# Altium PCB PCB1Good.PcbDoc
Units mm, origin at the board's own origin, x right, y up, seen from the top; angles counter-clockwise.
Board outline 152.4 x 101.6 mm, 2 copper layers (Top Layer, Bottom Layer); 69 components, 63 nets, 279 pads, 50 vias.
Unrouted connection lines stored in the file: 3.
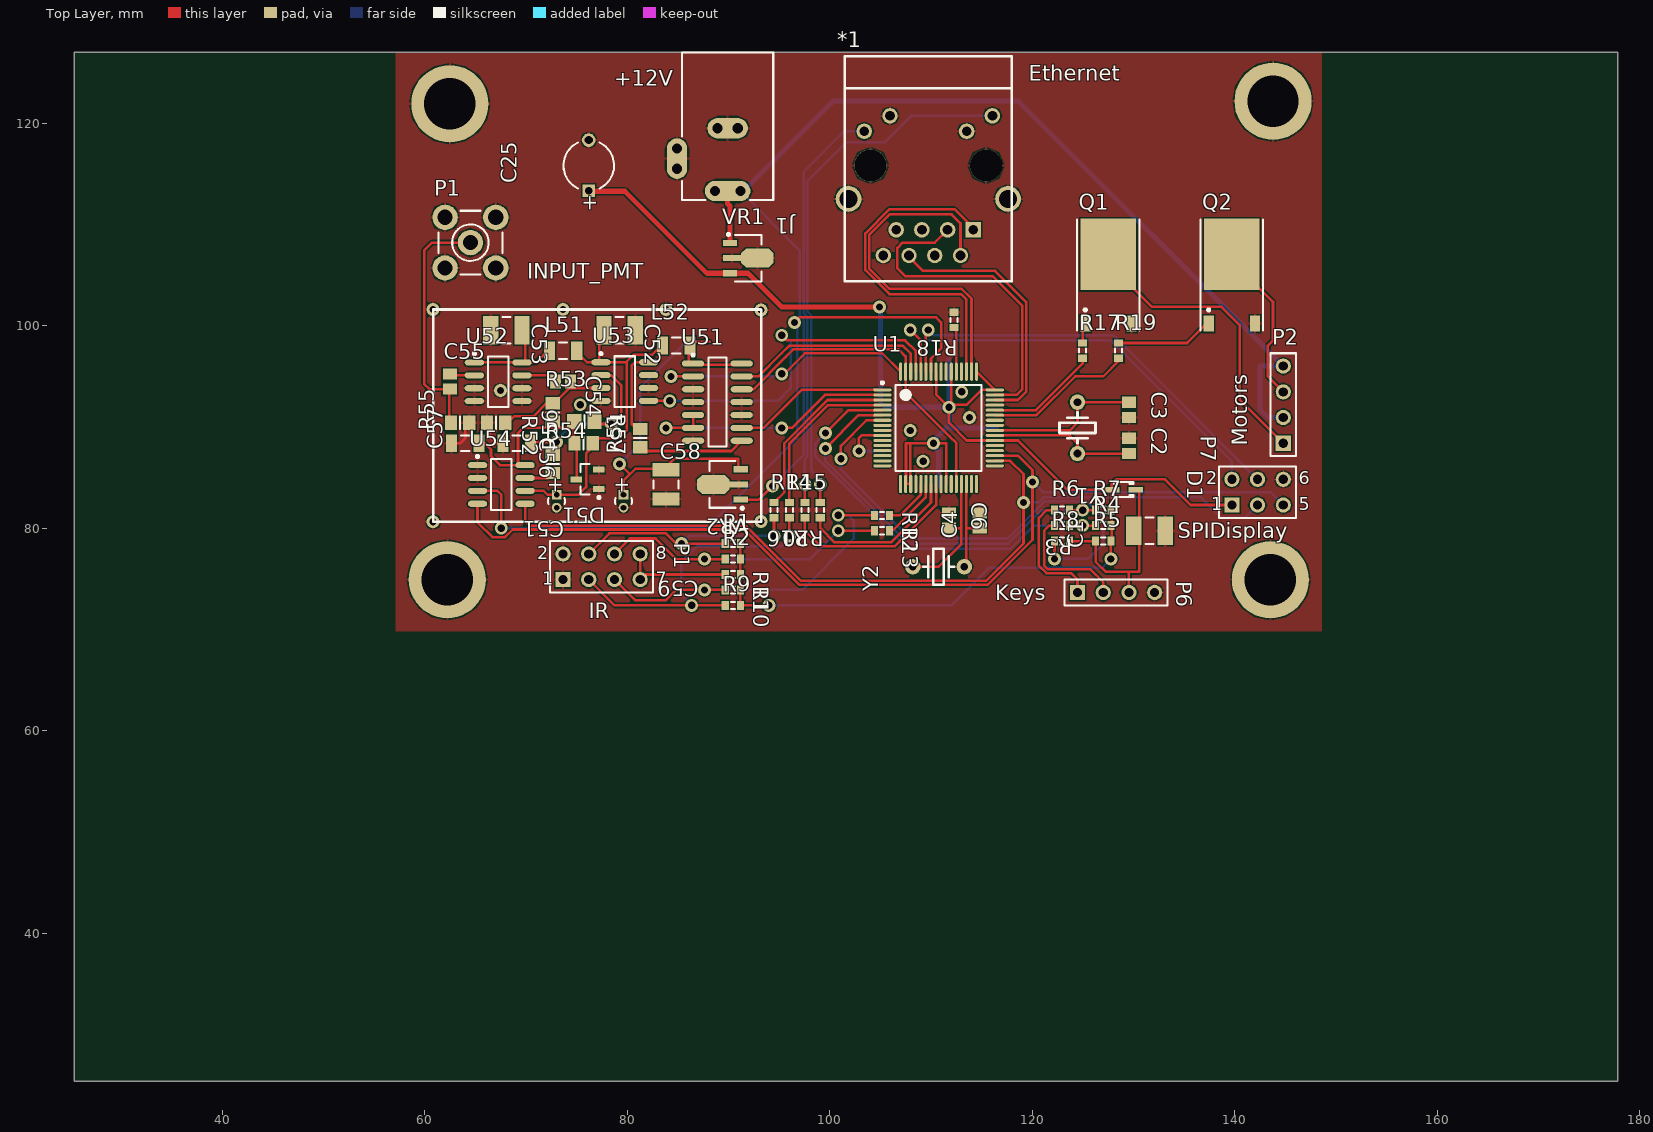
[diagram p0: Top Layer view]
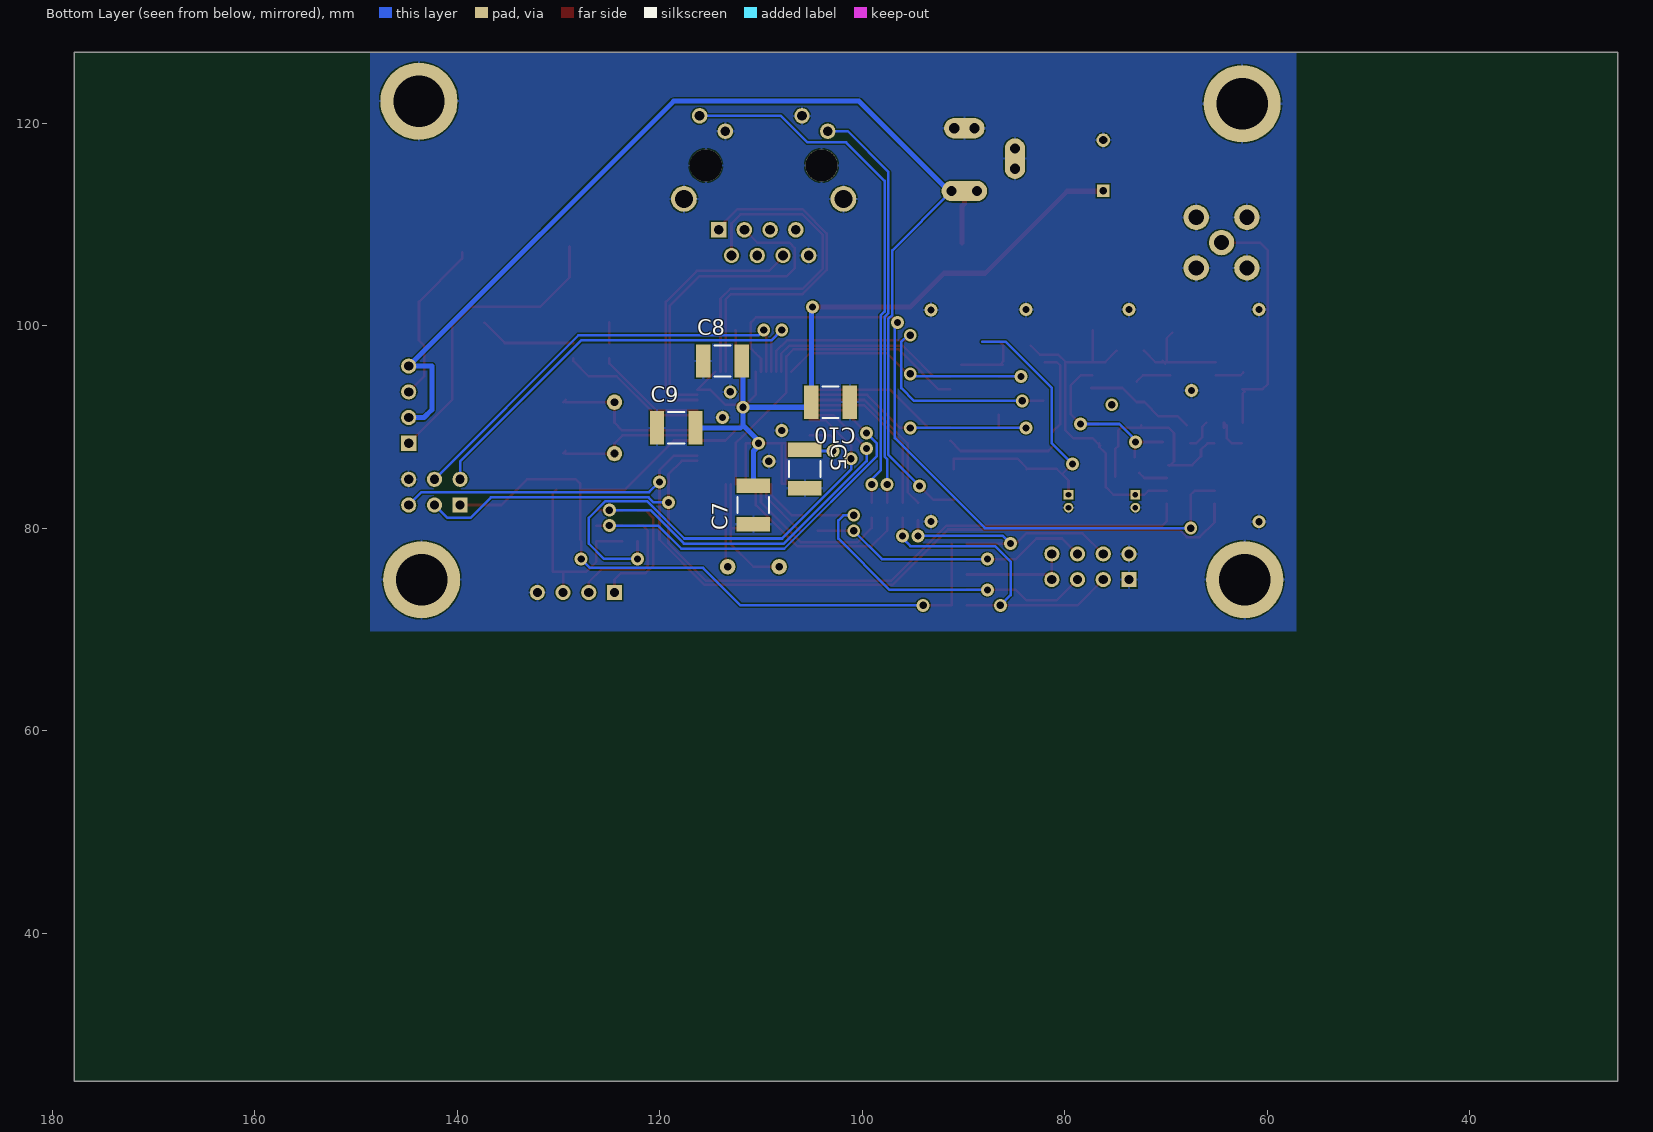
[diagram p1: Bottom Layer view, seen from below]

## Layer stack, top to bottom
Top Layer: signal copper 0.0356
Dielectric: dielectric 0.32, FR-4, Dk 4.8
Bottom Layer: signal copper 0.0356

## Board outline
25.4,25.4 177.8,25.4 177.8,127 25.4,127

## Design rules (kind name [scope] priority, off if disabled: settings)
Clearance [All] p1: gap=0.127
PolygonConnect [All] p1: connectstyle=Relief reliefconductorwidth=0.254 reliefentries=4 polygonreliefangle="90 Angle"
RoomDefinition Sheet1 [InComponentClass('Sheet1')] p1: confinementstyle=ConfineOut formatcopy=TRUE lockcomponents=FALSE outline 178.816,27.178 193.548,27.178 193.548,41.656 178.816,41.656
RoomDefinition Amp [InComponentClass('Amp')] p2: confinementstyle=ConfineOut formatcopy=TRUE lockcomponents=FALSE outline 186.436,5.588 258.064,5.588 258.064,26.162 186.436,26.162
RoutingVias [All] p1: holewidth=0.711 width=1.27 viastyle="Through Hole" minholewidth=0.711 minwidth=1.27 maxholewidth=0.711 maxwidth=1.27
SilkscreenOverComponentPads [All] p1: minsilkscreentomaskgap=0.254
SolderMaskExpansion [All] p1: expansion=0.102
Width [All] p1: maxlimit=2.54 minlimit=0.254 preferedwidth=0.254
27 further rules are at their usual default settings.

## Classes and differential pairs
component class Amp: C51 C52 C53 C54 C55 C56 C57 C58 C59 D51 L51 L52 P1 P? R51 R52 R53 R54 R55 R56 R57 U51 U52 U53 U54 VR2
component class Sheet1: * *1 *2 *3 *4 *5 *6 *7 *8 C1 C2 C3 C4 C5 C6 C7 C8 C9 C10 C11 C12 D1 J1 J2 P1 P2 P6 P7 Q1 Q2 R1 R2 R3 R4 R5 R6 R7 R8 R9 R10 R11 R12 R13 R14 R15 R16 R17 R18 R19 R20 R21 R22 R23 R24 R25 U1 U2 U3 U4 VR1 Y1 Y2

## Components (designator, comment, footprint, x,y, rotation, side; value= is the part's Value field where it differs from the comment)
*1 "Component_1" EthernetCON 109.728,115.824 r90 top
C1 "Cap" CAPC3225M 131.572,79.756 r180 top
C2 "Cap" CAPC2012L 129.54,88.138 r270 top
C3 "Cap" CAPC2012L 129.54,91.694 r270 top
C4 "Cap" CAPC2012L 114.808,80.772 r90 top
C5 "Cap" CAPC4532L 105.664,85.852 r270 bottom
C6 "Cap" CAPC2012L 111.76,80.772 r270 top
C7 "Cap" CAPC4532L 110.744,82.296 r90 bottom
C8 "Cap" CAPC4532L 113.792,96.52 r180 bottom
C9 "Cap" CAPC4532L 118.364,89.916 r180 bottom
C10 "Cap" CAPC4532L 103.124,92.456 r0 bottom
C25 "Comment" CAPPR5-5x5 76.2,115.824 r90 top
C51 "Cap Pol1" "Capacitor small" 73.025,83.312 r180 top
C52 "Cap" CAPC3225M 79.248,99.568 r0 top
C53 "Cap" CAPC3225M 68.072,99.568 r0 top
C54 "Cap" CAPC2012L 73.66,94.488 r0 top
C55 "Cap" CAPC2012L 62.484,94.488 r90 top
C56 "Cap" CAPC3216L 69.088,88.392 r0 top
C57 "Cap" CAPC3216L 64.008,88.392 r180 top
C58 "Cap" CAPC3225N 83.82,84.328 r90 top
C59 "Cap Pol1" "Capacitor small" 79.629,83.312 r180 top
D1 "Diode" SOD323 129.032,83.82 r0 top
D51 "Diode BAT17" SOT95P240-3N 76.073,84.836 r180 top
J1 "PWR2.5" KLD-0202 89.916,127 r270 top
L51 "Inductor" INDC3216AL 73.66,97.536 r0 top
L52 "Inductor" INDC3216AL 84.836,98.044 r0 top
P1 "SMB" SMB_V-RJ45 64.516,108.204 r0 top (schematic designator P?)
P1 "Header 4X2" HDR2X4 73.66,74.93 r0 top
P2 "Header 4" HDR1X4 144.78,88.392 r90 top
P6 "Header 4" HDR1X4 124.46,73.66 r0 top
P7 "Header 3X2" HDR2X3 139.7,82.296 r0 top
Q1 "IRLR2905" TO-252AA 127.508,103.632 r0 top
Q2 "IRLR2905" TO-252AA 139.7,103.632 r0 top
R1 "Res3" RESC1608L 90.424,78.486 r0 top
R2 "Res3" RESC1608L 90.424,76.962 r0 top
R3 "Res3" RESC1608L 122.936,80.264 r180 top
R4 "Res3" RESC1608L 127,80.264 r0 top
R5 "Res3" RESC1608L 127,78.74 r0 top
R6 "Res3" RESC1608L 122.936,81.788 r0 top
R7 "Res3" RESC1608L 127,81.788 r0 top
R8 "Res3" RESC1608L 122.936,78.74 r0 top
R9 "Res3" RESC1608L 90.424,72.39 r0 top
R10 "Res3" RESC1608L 90.424,73.914 r0 top
R11 "Res3" RESC1608L 90.424,75.438 r0 top
R12 "Res3" RESC1608L 105.156,81.28 r0 top
R13 "Res3" RESC1608L 105.156,79.756 r0 top
R14 "Res3" RESC1608L 94.488,81.788 r90 top
R15 "Res3" RESC1608L 96.012,81.788 r90 top
R16 "Res3" RESC1608L 97.536,81.788 r270 top
R17 "Res3" RESC1608L 124.968,97.536 r90 top
R18 "Res3" RESC1608L 112.268,100.584 r270 top
R19 "Res3" RESC1608L 128.524,97.536 r90 top
R20 "Res3" RESC1608L 99.06,81.788 r270 top
R51 "Res2" RESC2012N 81.28,88.9 r90 top
R52 "Res2" RESC2012N 67.056,90.424 r0 top
R53 "Res2" RESC2012N 72.644,91.44 r90 top
R54 "Res2" RESC2012N 72.644,86.36 r90 top
R55 "Res2" RESC2012N 63.5,90.424 r180 top
R56 "Res2" RESC2012N 75.692,88.392 r180 top
R57 "Res2" RESC2012M 75.765,90.551 r0 top
U1 "PIC18F67J60-I/PT" TQFP-PT64_N 110.744,89.916 r0 top
U51 "SN74S197D" D014_N 88.9,92.456 r0 top
U52 "SA5205A" SOIC127P600-8L 67.252,94.465 r0 top
U53 "AD8561" SOIC127P600-8L 79.756,94.488 r0 top
U54 "AD8400" SOIC127P600-8L 67.564,84.328 r0 top
VR1 "Volt Reg" SOT89N 91.948,106.68 r0 top
VR2 "Volt Reg" SOT89N 89.408,84.328 r180 top
Y1 "XTAL" Quartz 124.46,92.456 r270 top
Y2 "Z" Quartz 113.284,76.2 r180 top

## Footprints (in the part's own frame and the unit in brackets; to place one, negate y for a bottom-side part, rotate by r counter-clockwise, add the part's x,y. Pads: shape width x height; smd on the part's side, far side on the other; paste and mask are expansions set on the pad)
"Capacitor small" [mm]
  rect 0.95x0.95 hole 0.55: 1(0,0)
  round 0.95 hole 0.55: 2(0,1.27)
  silkscreen extent -0.85,0.34 0.85,0.93, body extent -1.01,-0.38 1.02,1.65, height 4.06
CAPC2012L [mm] "Chip Capacitor, Body 2.0x1.3mm, IPC High Density"
  rect 1.1x1.4 smd: 1(-0.75,0) 2(0.75,0)
  body extent -1.1,-0.72 1.1,0.72, height 1.4
CAPC3216L [mm] "Chip Capacitor, Body 3.2x1.6mm, IPC High Density"
  rect 1.1x1.7 smd: 1(-1.35,0) 2(1.35,0)
  silkscreen extent -0.4,-0.75 0.4,0.75, body extent -1.7,-0.9 1.7,0.9, height 1.3
CAPC3225M [mm] "Chip Capacitor, Body 3.2x2.5mm, IPC Low Density"
  rect 1.5x2.8 smd: 1(-1.55,0) 2(1.55,0)
  silkscreen extent -0.4,-1.3 0.4,1.3, body extent -1.7,-1.35 1.7,1.35, height 1.5
CAPC3225N [mm] "Chip Capacitor, Body 3.2x2.5mm, IPC Medium Density"
  rect 1.3x2.7 smd: 1(-1.45,0) 2(1.45,0)
  silkscreen extent -0.4,-1.25 0.4,1.25, body extent -1.7,-1.35 1.7,1.35, height 1.5
CAPC4532L [mm] "Chip Capacitor, Body 4.5x3.2mm, IPC High Density"
  rect 1.4x3.3 smd: 1(-1.9,0) 2(1.9,0)
  silkscreen extent -0.8,-1.55 0.8,1.55, body extent -2.4,-1.7 2.4,1.7, height 1.4
CAPPR5-5x5 [mm] "Capacitor, Electrolytic, Radial; Body 5 x 5 mm (Dia.xH typ); Pin Spacing 5 mm (typ)"
  rect 1.25x1.25 hole 0.75: 1(-2.5,0)
  round 1.35 hole 0.8: 2(2.5,0)
  silkscreen extent -2.26,-2.5 2.27,2.5
D014_N [mm] "SOIC, 14-Leads, Body 8.7x3.9mm, Pitch 1.27mm, IPC Medium Density"
  oval 2.2x0.6 smd: 1(-2.4,3.81) 2(-2.4,2.54) 3(-2.4,1.27) 4(-2.4,0) 5(-2.4,-1.27) 6(-2.4,-2.54) 7(-2.4,-3.81) 8(2.4,-3.81) 9(2.4,-2.54) 10(2.4,-1.27) 11(2.4,0) 12(2.4,1.27) 13(2.4,2.54) 14(2.4,3.81)
  silkscreen extent -2.52,-4.4 0.9,4.78, body extent -2,-4.38 2,4.38, height 1.75
EthernetCON [mil] "Ethernet connector w/two LEDs"
  rect 60x60 hole 38: 1(-250,-175)
  round 60 hole 38: 2(-350,-125) 3(-250,-75) 4(-350,-25) 5(-250,25) 6(-350,75) 7(-250,125) 8(-350,175) 9(193,-249) 10(133,-149) 11(193,149) 12(133,249)
  round 100 hole 70: 13(-130,-310) 14(-130,310)
  round 125 hole 125 unplated: 15(0,-225) 16(0,225)
  silkscreen extent -450,-325 425,325, body extent -450,-325 425,325, height 550
HDR1X4 [mm] "Connector; Header; 4 Position"
  rect 1.5x1.5 hole 0.9: 1(0,0)
  round 1.5 hole 0.9: 2(2.54,0) 3(5.08,0) 4(7.62,0)
  silkscreen extent -1.27,-1.27 8.89,1.27
HDR2X3 [mm] "Connector; Header; 3x2 Position"
  rect 1.5x1.5 hole 0.9: 1(0,0)
  round 1.5 hole 0.9: 2(0,2.54) 3(2.54,0) 4(2.54,2.54) 5(5.08,0) 6(5.08,2.54)
  silkscreen extent -1.27,-1.27 6.35,3.81
HDR2X4 [mm] "Connector; Header; 4x2 Position"
  rect 1.5x1.5 hole 0.9: 1(0,0)
  round 1.5 hole 0.9: 2(0,2.54) 3(2.54,0) 4(2.54,2.54) 5(5.08,0) 6(5.08,2.54) 7(7.62,0) 8(7.62,2.54)
  silkscreen extent -1.27,-1.27 8.89,3.81
INDC3216AL [mm] "Chip Inductor, Body 3.2x1.6mm, IPC High Density"
  rect 1.1x1.8 smd: 1(-1.35,0) 2(1.35,0)
  silkscreen extent -0.4,-0.8 0.4,0.8, body extent -1.7,-0.9 1.7,0.9, height 0.55
KLD-0202 [mm] "DC Power Jack, 2.5mm, KLD Series, PCB Mount"
  oval 2x4.5 all layers, no hole: 1(13.7,0)
  round 1.5 hole 1: 1A(13.7,-1.25) 1B(13.7,1.25) 2A(7.5,-1) 2B(7.5,1) 3A(9.5,-5) 3B(11.5,-5)
  oval 2x4 all layers, no hole: 2(7.5,0)
  oval 4x2 all layers, no hole: 3(10.5,-5)
  silkscreen extent 0,-4.5 14.6,4.5
Quartz [mil]
  round 60 hole 30: 1(0,0) 2(200,0)
  silkscreen extent 40,-70 160,70, body extent -100,-100 300,100, height 90
RESC1608L [mm] "Chip Resistor, Body 1.6x0.8mm, IPC High Density"
  rect 0.7x0.9 smd: 1(-0.75,0) 2(0.75,0)
  silkscreen extent -0.2,-0.35 0.2,0.35, body extent -0.85,-0.48 0.85,0.48, height 0.9
RESC2012M [mm] "Chip Resistor, Body 2.0x1.2mm, IPC Low Density"
  rect 1.4x1.5 smd: 1(-1,0) 2(1,0)
  silkscreen extent 0,-0.65 0,0.65, body extent -1.07,-0.7 1.07,0.7, height 0.7
RESC2012N [mm] "Chip Resistor, Body 2.0x1.2mm, IPC Medium Density"
  rect 1.2x1.4 smd: 1(-0.9,0) 2(0.9,0)
  silkscreen extent 0,-0.6 0,0.6, body extent -1.07,-0.7 1.07,0.7, height 0.7
SMB_V-RJ45 [mm] "Connector; SMB Straight"
  round 2.5 hole 1.5: 1(0,0) 2(-2.5,-2.5) 2(-2.5,2.5) 2(2.5,-2.5) 2(2.5,2.5)
  silkscreen extent -3.15,-3.15 3.15,3.15
SOD323 [mm] "SOD-323/SC-76; 2 Leads; Body 1.7 x 1.3 mm, (LxW)"
  rect 1.45x0.55 smd: 1(1.175,0) 2(-1.175,0)
  silkscreen extent -0.95,-0.75 0.95,0.75
SOIC127P600-8L [mm] "SOIC, 8-Leads, Body 4.9x3.9mm, Pitch 1.27mm, IPC High Density"
  oval 1.9x0.6 smd: 1(-2.35,1.905) 2(-2.35,0.635) 3(-2.35,-0.635) 4(-2.35,-1.905) 5(2.35,-1.905) 6(2.35,-0.635) 7(2.35,0.635) 8(2.35,1.905)
  silkscreen extent -2.47,-2.5 1,2.88, body extent -2,-2.5 2,2.5, height 1.75
SOT89N [mm] "SOT89, 3-Leads, Body 4.5x2.4 mm, Pitch 1.5mm, Lead Span 4.1mm, IPC Medium Density"
  rect 1.4x0.6 smd: 1(-1.8,1.5) 3(-1.8,-1.5)
  rect 1.8x0.6 smd: 2(-1.6,0)
  oct 3.2x1.9 smd: 2(0.9,0)
  silkscreen extent -2.07,-2.3 1.3,2.47, body extent -1.3,-2.3 1.3,2.3, height 1.6
SOT95P240-3N [mm] "SOT23, 3-Leads, Body 2.9x1.3mm, Pitch 0.95mm, Lead Span 2.4mm, IPC Medium Density"
  rect 1.15x0.6 smd: 1(-1.125,0.95) 2(-1.125,-0.95) 3(1.125,0)
  silkscreen extent -1.25,-1.5 0.7,1.92, body extent -0.7,-1.5 0.7,1.5, height 1.14
TO-252AA [mm] "D-PAK/TO-252-AA; 3 Leads (1 Cropped); Body 10.4 (inc. leads) x 6.7 mm (LxW max)"
  rect 1x1.6 smd: 1(-2.285,-3.425) 3(2.285,-3.425)
  rect 5.5x7.1 smd: 4(0,3.425)
  silkscreen extent -3.09,-4.13 3.09,6.88
TQFP-PT64_N [mm] "Thin QFP, 64-Leads, Body 10x10mm, Pitch 0.5mm, IPC Medium Density"
  oval 1.8x0.3 smd: 1(-5.55,3.75) 2(-5.55,3.25) 3(-5.55,2.75) 4(-5.55,2.25) 5(-5.55,1.75) 6(-5.55,1.25) 7(-5.55,0.75) 8(-5.55,0.25) 9(-5.55,-0.25) 10(-5.55,-0.75) 11(-5.55,-1.25) 12(-5.55,-1.75) 13(-5.55,-2.25) 14(-5.55,-2.75) 15(-5.55,-3.25) 16(-5.55,-3.75) 33(5.55,-3.75) 34(5.55,-3.25) 35(5.55,-2.75) 36(5.55,-2.25) 37(5.55,-1.75) 38(5.55,-1.25) 39(5.55,-0.75) 40(5.55,-0.25) 41(5.55,0.25) 42(5.55,0.75) 43(5.55,1.25) 44(5.55,1.75) 45(5.55,2.25) 46(5.55,2.75) 47(5.55,3.25) 48(5.55,3.75)
  oval 0.3x1.8 smd: 17(-3.75,-5.55) 18(-3.25,-5.55) 19(-2.75,-5.55) 20(-2.25,-5.55) 21(-1.75,-5.55) 22(-1.25,-5.55) 23(-0.75,-5.55) 24(-0.25,-5.55) 25(0.25,-5.55) 26(0.75,-5.55) 27(1.25,-5.55) 28(1.75,-5.55) 29(2.25,-5.55) 30(2.75,-5.55) 31(3.25,-5.55) 32(3.75,-5.55) 49(3.75,5.55) 50(3.25,5.55) 51(2.75,5.55) 52(2.25,5.55) 53(1.75,5.55) 54(1.25,5.55) 55(0.75,5.55) 56(0.25,5.55) 57(-0.25,5.55) 58(-0.75,5.55) 59(-1.25,5.55) 60(-1.75,5.55) 61(-2.25,5.55) 62(-2.75,5.55) 63(-3.25,5.55) 64(-3.75,5.55)
  silkscreen extent -5.67,-4.25 4.25,4.57, body extent -5,-5 5,5, height 1.2

## Part data
C1 C2 C3 C4 C5 C6 C7 C8 C9 C10 C52 C53 C54 C55 C56 C57 C58: "Capacitor"
C25: library part "Cap Pol1"
C51 C59: "Polarized Capacitor (Radial)"
D1: "Default Diode"
D51: "Silicon RF Schottky Diode for Mixer Applications in the VHF/UHF Range"
J1: "Low Voltage Power Supply Connector"
P1: "SMB Straight Connector"
P1: "Header, 4-Pin, Dual row"
P2 P6: "Header, 4-Pin"
P7: "Header, 3-Pin, Dual row"
Q1 Q2: "HEXFET Power MOSFET"
R1 R2 R3 R4 R5 R6 R7 R8 R9 R10 R11 R12 R13 R14 R15 R16 R17 R18 R19 R20 R51 R52 R53 R54 R55 R56 R57: "Resistor"
U1: "High Performance, 1-Mbit Flash Microcontroller with Ethernet, 128K Flash, 64-Pin TQFP, Industrial Temperature Range"
U51: "100-MHz Presettable Decade or Binary Counter / Latch"
U52: "Wide-band high-frequency amplifier"
U53: "Ultrafast 7 ns  Single Supply Comparator"
U54: "Digital Potentiometers"
VR1 VR2: "Voltage Regulator"
Y1: "Crystal Oscillator"
Y2: library part XTAL, "32768 kHz"

## Free pads (board coordinates)
  round 7.62 hole 5.08: 0(62.23,74.93) 0(62.484,121.92) 0(143.51,74.93) 0(143.764,122.174)

## Via types
v1: diameter 1.27, hole 0.711, Top Layer to Bottom Layer, 50 vias

## Nets (pads, with @x,y where several pads share a name; then routed paths per layer and width w, separated by ;. In a path a pad name is that pad's centre, name@x,y a point inside that pad or via, vN(x,y) a via of type N, cw(c..) or ccw(c..) an arc to the next point about the centre after c; other vN are vias at no path point)
+12: J1.1 J1.1A J1.1B P2.2 P2.4 VR1.1 VR2.1 | length 120.7
  Top Layer w0.254: VR2.1@90.981,82.828 VR2.1 92.988,82.828 v1(94.34,84.18)
  Top Layer w0.508: J1.1 89.916,112.05 90.148,111.818 VR1.1
  Bottom Layer w0.254: J1.1 J1.1B ; J1.1@91.456,113.3 J1.1B ; v1(94.34,84.18) 97.409,87.249 97.409,88.996 97.409,100.698 97.028,101.079 97.028,107.438 J1.1B
  Bottom Layer w0.508: J1.1@91.456,113.3 100.33,122.174 118.618,122.174 P2.4 142.494,96.012 142.494,91.694 143.256,90.932 P2.2
COUNTERRESET: U1.62 U51.13 | length 20.1
  Top Layer w0.254: U51.13 92.964,94.996 95.25,97.282 96.012,98.044 107.188,98.044 107.994,97.238 U1.62
D0: U1.2 U51.5 U51.6 | length 26.7
  Top Layer w0.254: v1(83.82,89.916) U51.6 U51.5 ; v1(95.25,89.916) 95.758,89.916 96.266,89.916 99.516,93.166 U1.2
  Bottom Layer w0.254: v1(83.82,89.916) v1(95.25,89.916)
D1: U1.1 U51.9 | length 15.4
  Top Layer w0.254: U51.9 93.472,89.916 97.222,93.666 U1.1
D2: U1.64 U51.2 | length 26.5
  Top Layer w0.254: v1(84.328,94.996) U51.2 ; v1(95.25,95.25) 95.504,95.25 97.536,97.282 105.178,97.282 U1.64
  Bottom Layer w0.254: v1(84.328,94.996) 94.996,94.996 v1(95.25,95.25)
D3: U1.28 U1.63 U51.12 | length 32.8
  Top Layer w0.254: U51.12 92.456,93.726 95.631,96.901 96.393,97.663 106.807,97.663 107.494,96.976 U1.63 107.494,93.42 111.83,89.084 112.494,88.42 U1.28
DISPOFF: P7.2 U1.60 | length 43.4
  Top Layer w0.254: v1(107.95,99.568) 108.994,98.524 U1.60
  Bottom Layer w0.254: v1(107.95,99.568) 108.966,98.552 127.762,98.552 139.7,86.614 P7.2
ENABLECOUNT: U1.61 U53.5 | length 36.2
  Top Layer w0.254: U53.5 v1(84.201,92.583) ; v1(95.25,99.06) 95.758,98.552 107.442,98.552 108.494,97.5 U1.61
  Bottom Layer w0.254: v1(84.201,92.583) 94.869,92.583 96.139,93.853 96.139,98.425 95.504,99.06 v1(95.25,99.06)
GND: *1.8 *1.10 *1.11 *1.13 *1.14 *1.15 *1.16 C1.1 C2.1 C3.2 C4.2 C5.2 C6.1 C7.1 C8.1 C9.1 C10.1 C25.2 C51.2 C52.2 C53.1 C56.1 C57.2 C58.1 C59.2 D51.1 D51.2 J1.2 J1.2A J1.2B J1.3 J1.3A J1.3B P1.1@73.66,74.93 P1.2 P6.4 P7.6 pad.0 Q1.3 Q2.3 R18.1 R52.1 R55.1 U1.9 U1.20 U1.25 U1.41 U1.45 U1.52 U1.55 U1.56 U51.3 U51.4 U51.7 U51.10 U51.11 U52.3 U52.4 U52.5 U52.6 U53.4 U53.6 U54.1 U54.2 VR1.2 VR2.2 | length 7.3
  Top Layer w0.254: C57.2@62.531,88.392 63.5,88.392 64.008,88.9 64.008,90.159 R55.1@64.273,90.424 ; R55.1@64.273,89.927 R55.1@64.273,90.424 ; R55.1@64.273,89.998 R55.1@64.273,90.424 ; R52.1@66.029,90.424 66.421,90.032 66.421,89.027 67.056,88.392 C56.1@67.611,88.392
  other v1: 60.833,80.645 93.218,80.666 109.22,86.614 107.95,89.662 113.792,90.932 113.03,93.472 67.484,93.599 93.218,101.565 60.833,101.6 73.66,101.6 83.82,101.6
INPUT: C55.1 P1.1@64.516,108.204 R55.2 | length 24.1
  Top Layer w0.254: C55.1@62.218,93.472 C55.1 60.464,93.738 59.944,94.258 59.944,107.442 60.706,108.204 P1.1@64.516,108.204 ; R55.2@62.404,90.424 C55.1@62.404,93.334
Net*1_1: *1.1 U1.51 | length 34.5
  Top Layer w0.254: U1.51 113.494,102.572 112.942,103.124 105.887,103.124 103.505,105.506 103.505,109.124 105.887,111.506 112.299,111.506 114.173,109.632 *1.1
Net*1_2: *1.2 U1.50 | length 35.3
  Top Layer w0.254: *1.2 112.903,110.109 112.014,110.998 105.918,110.998 103.886,108.966 103.886,105.664 105.918,103.632 113.03,103.632 113.994,102.668 U1.50
Net*1_3: *1.3 U1.47 | length 32.8
  Top Layer w0.254: *1.3 110.363,108.204 107.188,108.204 106.68,107.696 106.68,105.664 107.442,104.902 116.078,104.902 118.999,101.981 118.999,93.726 118.439,93.166 U1.47
Net*1_6: *1.6 U1.46 | length 25.8
  Top Layer w0.254: *1.6 107.823,106.807 109.22,105.41 116.332,105.41 119.38,102.362 119.38,93.472 118.574,92.666 U1.46
Net*1_9: *1.9 R20.1 | length 53.6
  Top Layer w0.254: R20.1 v1(99.06,84.328)
  Bottom Layer w0.254: v1(99.06,84.328) 99.06,84.836 98.171,85.725 98.171,88.681 98.171,97.931 98.171,101.014 97.79,101.395 97.79,114.3 101.6,118.11 105.41,118.11 108.026,120.726 *1.9 ; *1.9@115.824,120.65 *1.9@116.078,120.396
Net*1_12: *1.12 R16.1 | length 41.3
  Top Layer w0.254: R16.1 v1(97.536,84.328) v1@97.778,84.328
  Bottom Layer w0.254: v1(97.536,84.328) 97.821,84.328 97.917,84.424 97.536,84.805 97.536,86.837 97.79,87.091 97.79,88.838 97.79,100.856 97.409,101.237 97.409,115.189 101.422,119.202 *1.12
NetC1_2: C1.2 D1.1 P6.3 R5.1 R8.2 | length 20.7
  Top Layer w0.254: R8.2 R5.1 126.25,76.696 127.254,75.692 129.54,75.692 ; P6.3 129.54,75.692 ; D1.1 130.556,83.471 130.556,75.692 ; 129.54,75.692 130.556,75.692 ; 129.54,75.692 130.556,75.692
NetC2_2: C2.2 U1.39 Y1.2 | length 14.7
  Top Layer w0.254: U1.39 123.686,89.166 124.46,88.392 Y1.2 C2.2@129.298,87.376 ; C2.2@129.298,87.63 C2.2
NetC3_1: C3.1 U1.40 Y1.1 | length 15.7
  Top Layer w0.254: U1.40 123.702,89.666 124.46,90.424 Y1.1 C3.1@129.274,92.456 ; C3.1@129.274,92.71 C3.1
NetC4_1: C4.1 U1.30 Y2.1 | length 9.9
  Top Layer w0.254: Y2.1@113.018,75.934 Y2.1 113.494,76.41 113.494,80.01 ; U1.30 113.494,80.01 ; C4.1 114.796,80.01 113.494,80.01
NetC5_1: C5.1 U1.10 | length 6.5
  Top Layer w0.254: v1(102.87,87.63) 102.87,88.9 103.136,89.166 U1.10
  Bottom Layer w0.254: v1(102.87,87.63) 105.542,87.63 C5.1
NetC6_2: C6.2 U1.29 Y2.2 | length 13.2
  Top Layer w0.254: Y2.2@107.962,75.958 Y2.2 110.744,76.2 112.994,78.45 U1.29 ; C6.2 112.982,80.022
NetC51_1: C51.1 C52.1 L51.2 L52.1 R56.1 U53.1 U54.6 | length 34.7
  Top Layer w0.254: U54.6 71.755,83.693 72.136,83.312 C51.1 75.184,83.312 75.946,84.074 75.946,87.376 76.592,88.022 R56.1@76.592,88.218 ; L51.2@74.883,97.536 76.026,96.393 U53.1@77.279,96.393 ; R56.1@76.512,88.138 R56.1@76.592,88.218 ; R56.1 R56.1@76.592,88.218 ; C52.1@77.221,99.568 77.221,96.451 U53.1@77.279,96.393 ; L52.1@83.359,98.044 82.47,97.155 80.645,97.155 79.883,96.393 ; R56.1@76.592,88.218 77.274,88.9 79.168,88.9 79.93,89.662 79.93,96.346 79.883,96.393 ; U53.1@77.279,96.393 U53.1 79.883,96.393
NetC53_2: C53.2 L51.1 U52.1 U52.8 | length 11.1
  Top Layer w0.254: U52.1@65.087,96.393 69.787,96.393 U52.8@69.934,96.393 ; C53.2@69.384,99.314 69.934,98.764 U52.8@69.934,96.393 ; U52.8@70.061,96.266 U52.8@70.315,96.52 ; L51.1@72.183,97.536 71.04,96.393 U52.8@69.934,96.393
NetC54_1: C54.1 U52.7 | length 3.6
  Top Layer w0.254: U52.7 72.298,95.1 C54.1
NetC54_2: C54.2 R52.2 R53.2 U53.3 | length 11
  Top Layer w0.254: R52.2@67.945,90.17 68.834,91.059 70.739,91.059 72.147,92.467 72.909,92.467 74.295,93.853 U53.3
NetC55_2: C55.2 U52.2 | length 2.8
  Top Layer w0.254: C55.2@62.357,95.388 62.622,95.123 U52.2@65.087,95.123
NetC56_2: C56.2 R54.2 R57.2 U53.2 | length 19
  Top Layer w0.254: C56.2@70.304,88.519 72.818,88.519 72.882,88.423 73.072,88.138 R54.2@73.072,87.006 ; R57.2@76.639,90.297 v1(78.439,90.297) 79.422,91.28 79.422,94.107 78.406,95.123 U53.2@77.279,95.123
  Bottom Layer w0.254: v1(73.025,88.519) 73.025,88.726 74.596,90.297 v1(78.439,90.297)
NetC57_1: C57.1 D51.3 R53.1 R56.2 R57.1 U54.8 | length 20
  Top Layer w0.254: C57.1@65.231,88.392 65.913,88.392 66.548,87.757 66.548,87.122 67.437,86.233 U54.8@69.58,86.233 ; U54.8@69.643,86.17 U54.8@69.58,86.233 ; U54.8@69.787,86.233 U54.8@69.58,86.233 ; 72.448,89.921 74.489,89.921 74.712,89.698 74.712,88.138 74.995,87.855 D51.3@74.995,85.09 ; R53.1@72.448,90.17 72.448,89.916 69.723,89.916 69.215,89.408 69.215,86.598 U54.8@69.58,86.233
NetC58_2: C58.2 C59.1 L52.2 U51.1 U51.14 VR2.3 | length 41.6
  Top Layer w0.254: v1(79.248,86.36) 80.222,85.386 ; C59.1 79.629,84.709 80.798,85.878 C58.2@83.693,85.878 ; C58.2@83.743,85.828 C58.2@83.693,85.878 ; U51.1@86.106,96.139 U51.1@86.42,96.139 ; 88.138,98.425 86.44,98.425 86.059,98.044 86.059,96.5 U51.1@86.42,96.139 ; 90.204,96.139 U51.1@86.42,96.139 ; VR2.3@90.981,85.828 90.981,86.868 84.683,86.868 C58.2@83.693,85.878
  Bottom Layer w0.254: v1(79.248,86.36) 81.28,88.392 81.28,93.853 85.852,98.425 88.138,98.425
NetP1_3: P1.3 R9.1 R15.1 | length 32.7
  Top Layer w0.254: P1.3 78.74,72.39 v1(86.36,72.39) R9.1 ; v1@96.012,79.502 R15.1
  Bottom Layer w0.254: v1(86.36,72.39) 85.344,73.406 85.344,76.708 86.868,78.232 95.25,78.232 96.012,78.994 v1(96.012,79.248)
NetP1_4: P1.4 R1.1 R14.1 | length 25.7
  Top Layer w0.254: P1.4 78.232,79.502 83.82,79.502 84.836,78.486 86.36,78.486 R1.1 ; v1(94.488,79.248) R14.1@94.488,80.784
  Bottom Layer w0.254: v1(85.344,78.486) 86.106,79.248 v1(94.488,79.248)
NetP1_5: P1.5 R10.1 R12.1 | length 36.1
  Top Layer w0.254: P1.5 80.772,72.898 83.82,72.898 84.836,73.914 86.36,73.914 R10.1 ; v1(100.838,81.28) R12.1
  Bottom Layer w0.254: v1(87.63,73.914) 97.282,73.914 102.362,78.994 102.362,80.772 101.854,81.28 v1(100.838,81.28)
NetP1_6: P1.6 R2.1 R13.1 | length 30.3
  Top Layer w0.254: P1.6 80.264,78.994 82.804,78.994 84.836,76.962 86.36,76.962 R2.1 ; v1(100.838,79.756) R13.1
  Bottom Layer w0.254: v1(87.63,76.962) 98.044,76.962 v1(100.838,79.756)
NetP1_7: P1.7 P1.8 R11.1 | length 11.1
  Top Layer w0.254: P1.8 P1.7 81.788,75.438 R11.1
NetP2_1: P2.1 Q1.4 | length 30
  Top Layer w0.254: Q1.4@128.905,107.823 128.905,104.775 131.826,101.854 138.679,101.854 140.457,100.076 140.462,100.082 140.462,99.153 140.462,92.71 P2.1
NetP2_3: P2.3 Q2.4 | length 16.4
  Top Layer w0.254: Q2.4@139.508,107.25 139.508,106.618 143.764,102.362 143.764,98.552 143.256,98.044 143.256,94.996 P2.3
NetP6_1: P6.1 R6.1 | length 11.7
  Top Layer w0.254: R6.1 121.412,81.788 120.65,81.026 120.65,76.296 121.381,75.565 123.825,75.565 124.46,74.93 P6.1@124.46,74.168
NetP6_2: P6.2 R3.2 | length 12.5
  Top Layer w0.254: R3.2 121.666,80.264 121.158,79.756 121.158,76.327 121.539,75.946 125.73,75.946 127,74.676 P6.2@127,73.406
NetP7_4: P7.4 U1.59 | length 42.8
  Top Layer w0.254: U1.59 109.494,99.334 v1(109.728,99.568)
  Bottom Layer w0.254: v1(109.728,99.568) 110.236,99.06 128.016,99.06 P7.4
NetQ1_1: Q1.1 R17.2 | length 2
  Top Layer w0.254: R17.2 Q1.1@124.968,100.33
NetQ2_1: Q2.1 R19.2 | length 9.6
  Top Layer w0.254: R19.2@128.524,98.298 135.294,98.298 Q2.1@137.309,100.313
NetR3_1: R3.1 R4.1 U1.5 | length 43
  Top Layer w0.254: v1(99.568,89.408) 101.826,91.666 U1.5 ; R3.1 v1(124.968,80.264) R4.1
  Bottom Layer w0.254: v1(99.568,89.408) 98.552,88.392 98.552,87.122 107.696,77.978 117.856,77.978 120.142,80.264 v1(124.968,80.264)
NetR6_2: R6.2 R7.1 U1.6 | length 40.9
  Top Layer w0.254: v1(99.568,87.884) 102.85,91.166 U1.6 ; R6.2 v1(124.968,81.788) R7.1
  Bottom Layer w0.254: v1(99.568,87.884) 99.568,86.645 107.727,78.486 117.602,78.486 120.904,81.788 v1(124.968,81.788)
NetR8_1: R8.1 U1.7 | length 48.2
  Top Layer w0.254: v1(101.092,86.868) 101.092,88.138 103.62,90.666 U1.7 ; v1@122.174,76.962 v1(122.186,76.974) R8.1
  Bottom Layer w0.254: v1(101.092,86.868) 101.092,85.815 104.849,82.057 107.913,78.994 117.571,78.994 121.254,82.677 125.336,82.677 127,81.013 127,78.486 125.488,76.974 v1(122.186,76.974)
NetR12_2: R12.2 U1.21 | length 5
  Top Layer w0.254: R12.2 106.934,81.28 108.994,83.34 U1.21
NetR13_2: R13.2 U1.22 | length 6.3
  Top Layer w0.254: R13.2 106.172,79.756 109.494,83.078 U1.22
NetR14_2: R14.2 U1.3 | length 17.7
  Top Layer w0.254: R14.2 95.504,83.554 95.504,88.392 99.778,92.666 U1.3
NetR15_2: R15.2 U1.4 | length 16.6
  Top Layer w0.254: R15.2 96.012,88.361 99.817,92.166 U1.4
NetR16_2: R16.2 U1.24 | length 18.6
  Top Layer w0.254: R16.2 97.536,79.756 99.06,78.232 106.426,78.232 110.494,82.3 U1.24
NetR17_1: R17.1 U1.44 | length 11.1
  Top Layer w0.254: U1.44 120.368,91.666 124.968,96.266 R17.1
NetR18_2: R18.2 U1.53 | length 4.1
  Top Layer w0.254: U1.53 112.494,99.552 R18.2@112.51,99.568
NetR19_1: R19.1 U1.43 | length 14.7
  Top Layer w0.254: U1.43 120.407,91.166 124.237,94.996 127,94.996 128.524,96.52 R19.1
NetR20_2: R20.2 U1.23 | length 16
  Top Layer w0.254: R20.2 99.06,80.01 100.457,78.613 106.045,78.613 109.994,82.562 U1.23
NetR51_1: R51.1 U51.8 | length 10.6
  Top Layer w0.254: R51.1 81.65,87.63 90.284,87.63 U51.8
NetR51_2: R51.2 U53.8 | length 8.5
  Top Layer w0.254: R51.2@81.2,89.546 80.438,90.308 80.438,96.059 80.772,96.393 U53.8@81.979,96.393
NetR54_1: R54.1 U54.7 | length 2.9
  Top Layer w0.254: U54.7 72.147,84.963 R54.1
NetU1_36: U1.36
NetU1_59: 
SPI_CLK: P7.3 U1.34 U54.5 | length 89.8
  Top Layer w0.254: U54.5 69.914,80.708 70.358,80.264 91.694,80.264 97.155,74.803 115.412,74.803 119.126,78.517 119.126,82.804 119.126,83.058 119.126,83.312 119.126,85.344 117.804,86.666 U1.34
  Bottom Layer w0.254: v1(119.126,82.55) 120.588,82.55 121.096,83.058 136.652,83.058 138.684,81.026 140.97,81.026 P7.3
SPI_CS: U1.58 U54.3 | length 70.4
  Top Layer w0.254: U54.3 67.183,83.693 67.564,83.312 v1(67.564,80.01) ; v1(96.52,100.33) 97.028,100.838 110.49,100.838 110.998,100.33 110.998,97.766 110.514,97.282 109.994,96.762 U1.58
  Bottom Layer w0.254: v1(67.564,80.01) 87.884,80.01 96.774,88.9 96.774,100.076 v1(96.52,100.33)
SPI_SD: P7.5 U1.35 U54.4 | length 98.6
  Top Layer w0.254: U54.4 65.214,80.582 66.675,79.121 67.932,79.121 68.694,79.883 91.536,79.883 96.997,74.422 115.57,74.422 120.015,78.867 v1(120.015,84.582) 120.015,85.756 118.605,87.166 U1.35
  Bottom Layer w0.254: v1(120.015,84.582) 121.031,83.566 143.51,83.566 P7.5
VCC: C7.2 C8.2 C9.2 C10.2 C25.1 D1.2 P7.1 R1.2 R2.2 R4.2 R5.2 R7.2 R9.2 R10.2 R11.2 U1.18 U1.19 U1.26 U1.38 U1.48 U1.49 U1.54 U1.57 VR1.3 | length 187.2
  Top Layer w0.254: R1.2 R2.2 R11.2 R10.2 R9.2 v1(93.98,72.39) ; 107.526,87.292 U1.18@107.526,84.398 ; v1@109.982,88.392 107.962,88.392 ; v1(110.236,88.392) 111.494,88.392 U1.26 ; U1.57 110.494,93.214 v1(111.76,91.948) ; U1.54 v1@111.994,92.182 ; U1.49@114.554,95.406 U1.49 U1.48 115.002,93.666 113.518,92.182 v1@111.994,92.182 ; R5.2 v1(127.75,76.974) v1@127.762,76.962 ; R5.2@127.857,78.847 127.857,80.264 D1.2 ; P7.1 135.636,82.296 133.096,84.836 128.27,84.836 127.857,84.423 D1.2 ; U1.18@107.526,84.398 107.526,88.392 107.962,88.392 ; U1.18@107.526,84.398 107.962,84.398 107.962,88.392 ; v1(111.76,91.948) v1@111.994,92.182 ; v1(111.76,91.948) 111.76,90.424 113.518,88.666 U1.38 118.598,88.666 123.444,83.82 D1.2
  Top Layer w0.508: C25.1@76.2,113.284 79.756,113.284 87.86,105.18 91.924,105.18 95.25,101.854 v1(104.902,101.854)
  Bottom Layer w0.254: v1(93.98,72.39) 112.014,72.39 115.709,76.085 126.861,76.085 v1(127.75,76.974) ; C10.2 C10.2@105.532,91.948 ; 111.76,90.17 112.014,89.916
  Bottom Layer w0.508: C10.2 105.024,98.298 v1@105.024,101.732 ; C10.2@105.532,91.948 v1(111.76,91.948) ; v1@110.109,88.265 110.744,87.63 C7.2 ; v1@110.109,88.519 111.76,90.17 v1(111.76,91.948) ; C8.2@111.76,96.652 v1(111.76,91.948) ; 112.014,89.916 C9.2
pads on no net: *1.4 *1.5 *1.7 U1.8 U1.11 U1.12 U1.13 U1.14 U1.15 U1.16 U1.17 U1.27 U1.31 U1.32 U1.33 U1.37 U1.42 U53.7
copper on no net:
  other v1: 75.358,92.202

## Polygon pours and split planes (outlines as drawn)
GND on Bottom Layer "Bottom Layer-No Net" (solid, remove dead copper, pour order 1000): 57.15,127 57.15,69.85 148.59,69.85 148.59,127
GND on Top Layer "Bottom Layer-No Net" (solid, remove dead copper, pour order 1001): 57.15,127 57.15,69.85 148.59,69.85 148.59,127

## Silkscreen, mask and mechanical layers (free items; w line width, h text height)
Top Overlay:
  lines w0.254: 60.833,80.645 60.833,101.6 93.183,101.6 93.218,101.565 93.218,80.666 93.197,80.645 60.833,80.645
  text "Ethernet" at 119.634,124.206 h1.52
  text "+12V" at 78.74,123.698 h1.52
  text "INPUT_PMT" at 70.104,104.648 h1.52
  text "Motors" at 141.224,88.138 h1.52 r90
  text "SPIDisplay" at 134.366,78.994 h1.52
  text "Keys" at 116.332,72.898 h1.52
  text "IR" at 76.2,71.12 h1.52

## Text inside footprints (layer, text, board x,y; h text height)
C25: Top Overlay "+" at 76.95,111.274 h1.5 r90
C51: Top Overlay "+" at 72.275,85.162 h1.5 r270
C59: Top Overlay "+" at 78.879,85.162 h1.5 r270
J1: Mechanical 1 "Mech 2 - Clearance, move to internal plane if present" at 94.982,126.714 h0.3 r270; Mechanical 1 "Mech 1 - Slot cut-out" at 95.482,126.714 h0.3 r270; Mechanical 1 "Assign keep-out area to slot" at 96.482,126.714 h0.3 r270; Mechanical 1 "Alert PCB fab to slot details" at 95.982,126.714 h0.3 r270
P1: Top Overlay "2" at 71.12,76.962 h1.27; Top Overlay "1" at 71.628,74.422 h1.27; Top Overlay "7" at 82.804,74.422 h1.27; Top Overlay "8" at 82.804,76.962 h1.27
P7: Top Overlay "6" at 146.304,84.328 h1.27; Top Overlay "5" at 146.304,81.788 h1.27; Top Overlay "2" at 137.16,84.328 h1.27; Top Overlay "1" at 137.668,81.788 h1.27